# EAGLE board 2-28-13 x4 (EAGLE 6.3), part 1 of 3
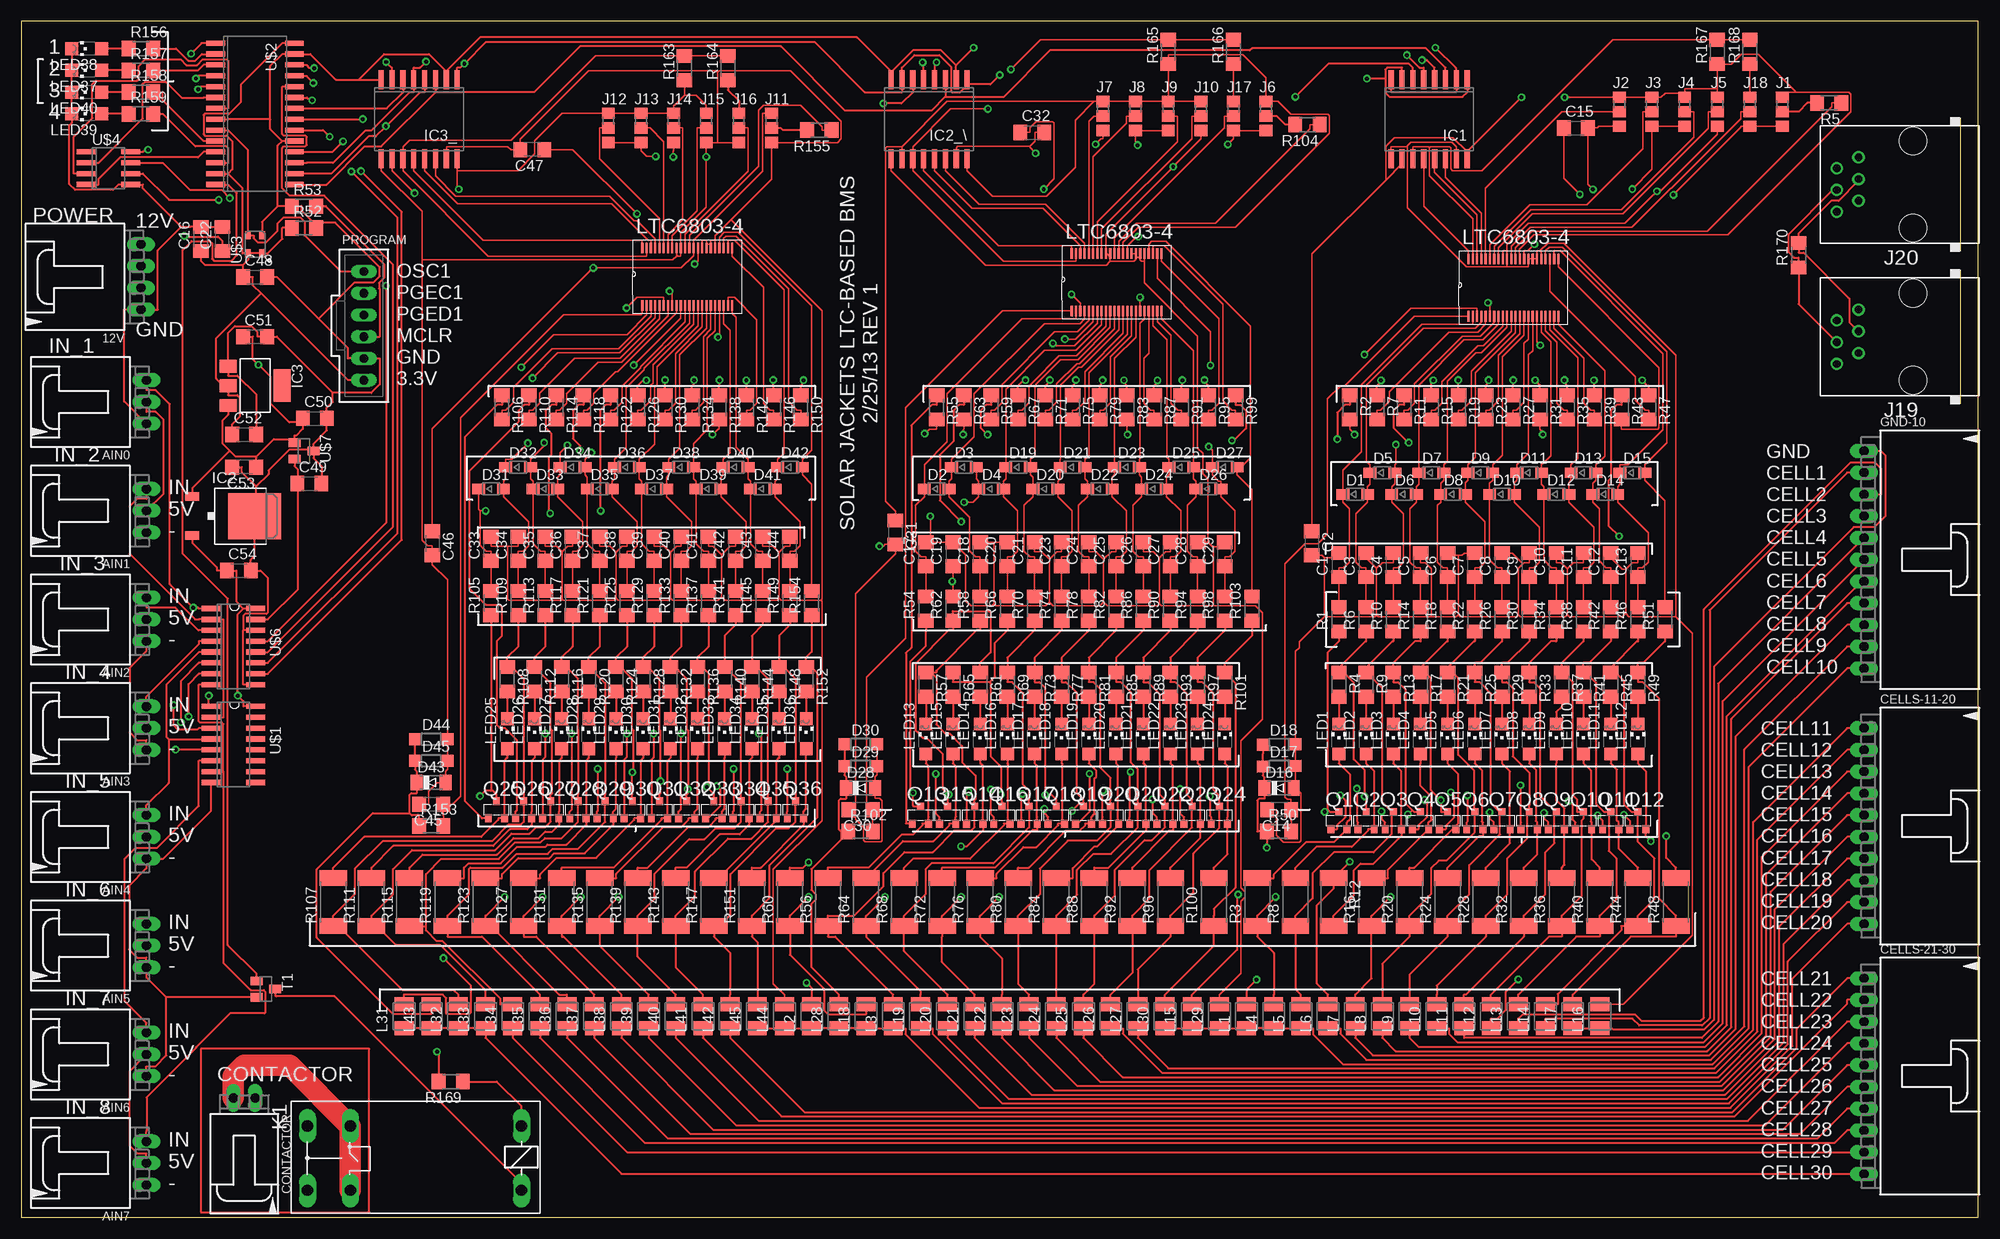
[diagram p0: board, top side]
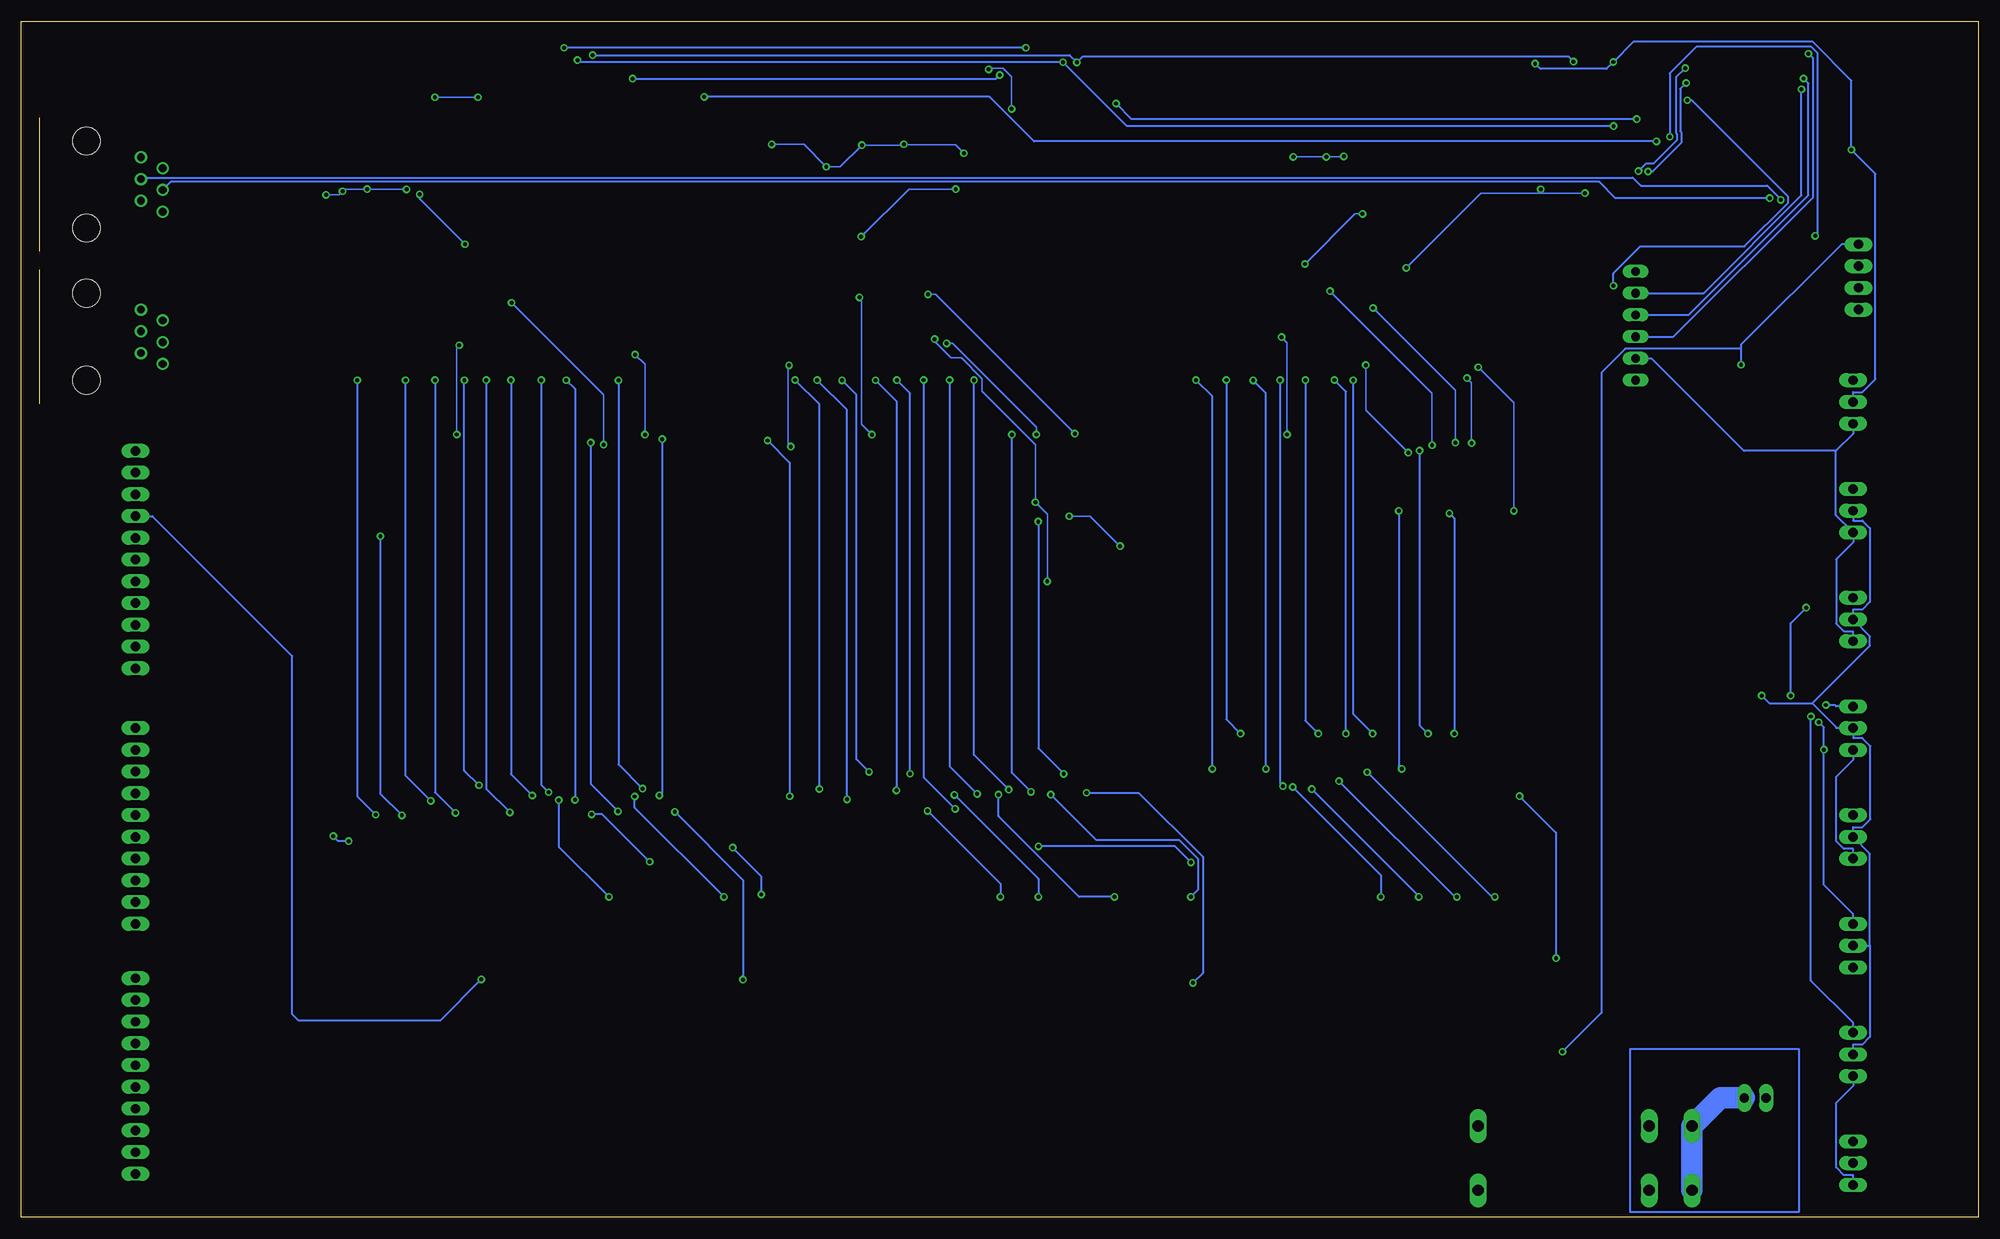
[diagram p1: board, bottom side, seen from below]

Size 228.6 x 139.7 mm. Coordinates in mm from the lower left corner, seen from the top.
Outline: 0,0 228.6,0 228.6,139.7 0,139.7 0,0
Copper layers (1*16): Top 0.035mm / dielectric 1.5mm / Bottom 0.035mm
Design rules "default": minimum track width 10mil, minimum drill 24mil, track to track 8mil, track to pad 8mil, pad to pad 8mil, via to via 8mil, smd to smd 8mil, copper to edge 40mil, drill to drill 8mil, minimum pad ring 10mil, minimum via ring 8mil, stop-mask expansion 4mil, vias tented up to drill 0mil, thermal gap 10mil
Net classes: 0 default: width 0.254 mm; 1 Mini: width 0.203 mm
tRestrict: 3 lines
bRestrict: 3 lines

## Footprints (pad centres in the part's own frame; a part is rotated, then mirrored left to right if it is on the bottom)
70553-04 = drill 1.092 long: 1 -3.81,-7.62; 2 -1.27,-7.62; 3 1.27,-7.62; 4 3.81,-7.62
70553-03 = drill 1.092 long: 1 -2.54,-7.62; 2 0,-7.62; 3 2.54,-7.62
C1206 = smd 1.6 x 1.8: 1 -1.4,0; 2 1.4,0
70553-10 = drill 1.092 long: 1 -11.43,-7.62; 2 -8.89,-7.62; 3 -6.35,-7.62; 4 -3.81,-7.62; 5 -1.27,-7.62; 6 1.27,-7.62; 7 3.81,-7.62; 8 6.35,-7.62; 9 8.89,-7.62; 10 11.43,-7.62
70553-02 = drill 1.092 long: 1 -1.27,-7.62; 2 1.27,-7.62
SOD323-W = smd 1.5 x 1.2: A 1.45,0; C -1.45,0
MINIMELF = smd 1.4 x 1.8: A 1.7,0; C -1.7,0
SOD123 = smd 1.4 x 1.4: A 1.9,0; C -1.9,0
70553-11 = drill 1.092 long: 1 -12.7,-7.62; 2 -10.16,-7.62; 3 -7.62,-7.62; 4 -5.08,-7.62; 5 -2.54,-7.62; 6 0,-7.62; 7 2.54,-7.62; 8 5.08,-7.62; 9 7.62,-7.62; 10 10.16,-7.62; 11 12.7,-7.62
SO16W = smd 0.6 x 2.2: 1 -4.445,-4.6; 2 -3.175,-4.6; 3 -1.905,-4.6; 4 -0.635,-4.6; 5 0.635,-4.6; 6 1.905,-4.6; 7 3.175,-4.6; 8 4.445,-4.6; 9 4.445,4.6; 10 3.175,4.6; 11 1.905,4.6; 12 0.635,4.6; 13 -0.635,4.6; 14 -1.905,4.6; 15 -3.175,4.6; 16 -4.445,4.6
TO252 = smd 1 x 1.6: 1 -2.28,-4.8; 2 2.28,-4.8 | smd 5.4 x 6.2: 3 0,2.5
SOT223 = smd 1.499 x 2.007: 1 -2.261,-3.15; 2 0.025,-3.15; 3 2.311,-3.15 | smd 3.81 x 2.007: 4 0,3.15
A0R-JMP = smd 1.5 x 1.3: 1 0,1.7; 2 0,0; 3 0,-1.7
RJ11-NO_SHIELD = drill 0.9 pad 1.4: 1 -3.175,8.89; 2 -1.905,6.35; 3 -0.635,8.89; 4 0.635,6.35; 5 1.905,8.89; 6 3.175,6.35 | hole 3.251: -5.08,0; 5.08,0
G2REA = drill 1.321 long: 1 -2.54,-3.683; 2 -2.54,3.81; P 17.45,-3.683; P@ 17.45,3.81; S 22.454,-3.683; S@ 22.454,3.81
L3225M = smd 1.6 x 2.2: 1 -1.4,0; 2 1.4,0
CHIPLED_1206 = smd 1.5 x 1.5: A 0,-1.75; C 0,1.75
SSOP44 = smd 0.25 x 1.25: P$1 -5.82,-3.33; P$2 -5.32,-3.33; P$3 -4.82,-3.33; P$4 -4.32,-3.33; P$5 -3.82,-3.33; P$6 -3.32,-3.33; P$7 -2.82,-3.33; P$8 -2.32,-3.33; P$9 -1.82,-3.33; P$10 -1.32,-3.33; P$11 -0.82,-3.33; P$12 -0.32,-3.33; P$13 0.18,-3.33; P$14 0.68,-3.33; P$15 1.18,-3.33; P$16 1.68,-3.33; P$17 2.18,-3.33; P$18 2.68,-3.33; P$19 3.18,-3.33; P$20 3.68,-3.33; P$21 4.18,-3.33; P$22 4.68,-3.33; P$23 4.68,3.37; P$24 4.18,3.37; P$25 3.68,3.37; P$26 3.18,3.37; P$27 2.68,3.37; P$28 2.18,3.37; P$29 1.68,3.37; P$30 1.18,3.37; P$31 0.68,3.37; P$32 0.18,3.37; P$33 -0.32,3.37; P$34 -0.82,3.37; P$35 -1.32,3.37; P$36 -1.82,3.37; P$37 -2.32,3.37; P$38 -2.82,3.37; P$39 -3.32,3.37; P$40 -3.82,3.37; P$41 -4.32,3.37; P$42 -4.82,3.37; P$43 -5.32,3.37; P$44 -5.82,3.37
70543-06 = drill 1.016 long: 1 -6.35,0; 2 -3.81,0; 3 -1.27,0; 4 1.27,0; 5 3.81,0; 6 6.35,0
MICRO3 = smd 0.8 x 0.9: 1 -0.95,-1; 2 0.95,-1; 3 0,1
R1206 = smd 1.6 x 1.803: 1 -1.422,0; 2 1.422,0
R2512 = smd 1.8 x 3.2: 1 -2.8,0; 2 2.8,0
SOT23 = smd 1 x 1.4: 1 -0.95,-1.1; 2 0.95,-1.1; 3 0,1.1
SO16 = smd 0.6 x 2.2: 1 -4.445,-2.6; 2 -3.175,-2.6; 3 -1.905,-2.6; 4 -0.635,-2.6; 5 0.635,-2.6; 6 1.905,-2.6; 7 3.175,-2.6; 8 4.445,-2.6; 9 4.445,2.6; 10 3.175,2.6; 11 1.905,2.6; 12 0.635,2.6; 13 -0.635,2.6; 14 -1.905,2.6; 15 -3.175,2.6; 16 -4.445,2.6
SO28W = smd 0.6 x 2.2: 1 -8.255,-4.6; 2 -6.985,-4.6; 3 -5.715,-4.6; 4 -4.445,-4.6; 5 -3.175,-4.6; 6 -1.905,-4.6; 7 -0.635,-4.6; 8 0.635,-4.6; 9 1.905,-4.6; 10 3.175,-4.6; 11 4.445,-4.6; 12 5.715,-4.6; 13 6.985,-4.6; 14 8.255,-4.6; 15 8.255,4.6; 16 6.985,4.6; 17 5.715,4.6; 18 4.445,4.6; 19 3.175,4.6; 20 1.905,4.6; 21 0.635,4.6; 22 -0.635,4.6; 23 -1.905,4.6; 24 -3.175,4.6; 25 -4.445,4.6; 26 -5.715,4.6; 27 -6.985,4.6; 28 -8.255,4.6
ASE = smd 0.9 x 0.65: 1 -1.05,-0.825; 2 1.05,-0.825; 3 1.05,0.825; 4 -1.05,0.825
SO-08 = smd 0.6 x 2.2: 1 -1.905,-2.6; 2 -0.635,-2.6; 3 0.635,-2.6; 4 1.905,-2.6; 5 1.905,2.6; 6 0.635,2.6; 7 -0.635,2.6; 8 -1.905,2.6

## Placement (x,y rotation side)
12V  C-GRID-04-70553  [70553-04]  6.35,109.86 90 top
AIN0  C-GRID-03-70553  [70553-03]  6.99,95.25 90 top
AIN1  C-GRID-03-70553  [70553-03]  6.99,82.55 90 top
AIN2  C-GRID-03-70553  [70553-03]  6.99,69.85 90 top
AIN3  C-GRID-03-70553  [70553-03]  6.99,57.15 90 top
AIN4  C-GRID-03-70553  [70553-03]  6.99,44.45 90 top
AIN5  C-GRID-03-70553  [70553-03]  6.99,31.75 90 top
AIN6  C-GRID-03-70553  [70553-03]  6.99,19.05 90 top
AIN7  C-GRID-03-70553  [70553-03]  6.99,6.35 90 top
C1  100nF 100V  [C1206]  153.92,76.2 90 top
C2  1uF  [C1206]  150.75,78.74 270 top
C3  100nF 100V  [C1206]  157.1,76.2 90 top
C4  100nF 100V  [C1206]  160.27,76.2 90 top
C5  100nF 100V  [C1206]  163.45,76.2 90 top
C6  100nF 100V  [C1206]  166.62,76.2 90 top
C7  100nF 100V  [C1206]  169.8,76.2 90 top
C8  100nF 100V  [C1206]  172.97,76.2 90 top
C9  100nF 100V  [C1206]  176.15,76.2 90 top
C10  100nF 100V  [C1206]  179.32,76.2 90 top
C11  100nF 100V  [C1206]  182.5,76.2 90 top
C12  100nF 100V  [C1206]  185.67,76.2 90 top
C13  100nF 100V  [C1206]  188.85,76.2 90 top
C14  100nF 100V  [C1206]  146.94,47.62 180 top
C15  1uF  [C1206]  181.61,127.25 0 top
C16  .1uF  [C1206]  20.95,114.3 90 top
C17  100nF 100V  [C1206]  105.66,77.47 90 top
C18  100nF 100V  [C1206]  112.01,77.47 90 top
C19  100nF 100V  [C1206]  108.84,77.47 90 top
C20  100nF 100V  [C1206]  115.19,77.47 90 top
C21  100nF 100V  [C1206]  118.36,77.47 90 top
C22  1uF  [C1206]  23.5,114.3 90 top
C23  100nF 100V  [C1206]  121.54,77.47 90 top
C24  100nF 100V  [C1206]  124.71,77.47 90 top
C25  100nF 100V  [C1206]  127.89,77.47 90 top
C26  100nF 100V  [C1206]  131.06,77.47 90 top
C27  100nF 100V  [C1206]  134.24,77.47 90 top
C28  100nF 100V  [C1206]  137.41,77.47 90 top
C29  100nF 100V  [C1206]  140.59,77.47 90 top
C30  100nF 100V  [C1206]  98.04,47.62 180 top
C31  1uF  [C1206]  102.11,80.01 270 top
C32  1uF  [C1206]  118.11,126.75 0 top
C33  100nF 100V  [C1206]  54.86,78.11 90 top
C34  100nF 100V  [C1206]  58.04,78.11 90 top
C35  100nF 100V  [C1206]  61.21,78.11 90 top
C36  100nF 100V  [C1206]  64.39,78.11 90 top
C37  100nF 100V  [C1206]  67.56,78.11 90 top
C38  100nF 100V  [C1206]  70.74,78.11 90 top
C39  100nF 100V  [C1206]  73.91,78.11 90 top
C40  100nF 100V  [C1206]  77.09,78.11 90 top
C41  100nF 100V  [C1206]  80.26,78.11 90 top
C42  100nF 100V  [C1206]  83.44,78.11 90 top
C43  100nF 100V  [C1206]  86.61,78.11 90 top
C44  100nF 100V  [C1206]  89.79,78.11 90 top
C45  100nF 100V  [C1206]  47.88,48.26 180 top
C46  1uF  [C1206]  48.01,78.74 270 top
C47  1uF  [C1206]  59.69,124.71 180 top
C48  .1uF  [C1206]  27.3,109.86 0 top
C49  .1uF  [C1206]  33.66,85.72 0 top
C50  1uF  [C1206]  34.29,93.34 0 top
C51  1uF  [C1206]  27.3,102.87 0 top
C52  .1uF  [C1206]  26.04,91.44 0 top
C53  1uF  [C1206]  26.04,87.63 180 top
C54  .1uF  [C1206]  25.4,75.56 0 top
CELLS-11-20  C-GRID-10-70553  [70553-10]  222.88,45.72 270 top
CELLS-21-30  C-GRID-10-70553  [70553-10]  222.88,16.51 270 top
CONTACTOR  C-GRID-02-70553  [70553-02]  26.04,6.35 180 top
D1  PDZ7.5B  [SOD323-W]  155.83,84.45 0 top
D2  PDZ7.5B  [SOD323-W]  106.93,85.09 0 top
D3  PDZ7.5B  [SOD323-W]  110.11,87.63 0 top
D4  PDZ7.5B  [SOD323-W]  113.28,85.09 0 top
D5  PDZ7.5B  [SOD323-W]  159,87 0 top
D6  PDZ7.5B  [SOD323-W]  161.54,84.45 0 top
D7  PDZ7.5B  [SOD323-W]  164.72,87 0 top
D8  PDZ7.5B  [SOD323-W]  167.26,84.45 0 top
D9  PDZ7.5B  [SOD323-W]  170.43,87 0 top
D10  PDZ7.5B  [SOD323-W]  172.97,84.45 0 top
D11  PDZ7.5B  [SOD323-W]  176.15,87 0 top
D12  PDZ7.5B  [SOD323-W]  179.32,84.45 0 top
D13  PDZ7.5B  [SOD323-W]  182.5,87 0 top
D14  PDZ7.5B  [SOD323-W]  185.04,84.45 0 top
D15  PDZ7.5B  [SOD323-W]  188.21,87 0 top
D16  ZMM5265B-7  [MINIMELF]  146.94,50.16 0 top
D17  BAT46W  [SOD123]  146.94,52.7 1 top
D18  BAT46W  [SOD123]  146.94,55.24 1 top
D19  PDZ7.5B  [SOD323-W]  116.46,87.63 0 top
D20  PDZ7.5B  [SOD323-W]  119.63,85.09 0 top
D21  PDZ7.5B  [SOD323-W]  122.81,87.63 0 top
D22  PDZ7.5B  [SOD323-W]  125.98,85.09 0 top
D23  PDZ7.5B  [SOD323-W]  129.16,87.63 0 top
D24  PDZ7.5B  [SOD323-W]  132.33,85.09 0 top
D25  PDZ7.5B  [SOD323-W]  135.51,87.63 0 top
D26  PDZ7.5B  [SOD323-W]  138.68,85.09 0 top
D27  PDZ7.5B  [SOD323-W]  140.59,87.63 0 top
D28  ZMM5265B-7  [MINIMELF]  98.04,50.16 0 top
D29  BAT46W  [SOD123]  98.04,52.7 0 top
D30  BAT46W  [SOD123]  98.04,55.24 0 top
D31  PDZ7.5B  [SOD323-W]  54.86,85.09 0 top
D32  PDZ7.5B  [SOD323-W]  58.04,87.63 0 top
D33  PDZ7.5B  [SOD323-W]  61.21,85.09 0 top
D34  PDZ7.5B  [SOD323-W]  64.39,87.63 0 top
D35  PDZ7.5B  [SOD323-W]  67.56,85.09 0 top
D36  PDZ7.5B  [SOD323-W]  70.74,87.63 0 top
D37  PDZ7.5B  [SOD323-W]  73.91,85.09 0 top
D38  PDZ7.5B  [SOD323-W]  77.09,87.63 0 top
D39  PDZ7.5B  [SOD323-W]  80.26,85.09 0 top
D40  PDZ7.5B  [SOD323-W]  83.44,87.63 0 top
D41  PDZ7.5B  [SOD323-W]  86.61,85.09 0 top
D42  PDZ7.5B  [SOD323-W]  89.79,87.63 0 top
D43  ZMM5265B-7  [MINIMELF]  47.88,50.8 0 top
D44  BAT46W  [SOD123]  47.88,55.88 0 top
D45  BAT46W  [SOD123]  47.88,53.34 0 top
GND-10  C-GRID-11-70553  [70553-11]  222.88,76.83 270 top
IC1  ADUM1401  [SO16W]  164.47,128.27 180 top
IC2  7805DT  [TO252]  24.77,81.92 270 top
IC2_\  ADUM1401  [SO16W]  106.05,128.27 180 top
IC3  REG1117  [SOT223]  27.3,97.16 270 top
IC3_  ADUM1401  [SO16W]  46.48,128.27 180 top
J1  TOS_LTC1  [A0R-JMP]  205.74,129.16 0 top
J2  A3_LTC1  [A0R-JMP]  186.69,129.16 0 top
J3  A2_LTC1  [A0R-JMP]  190.5,129.16 0 top
J4  A1_LTC1  [A0R-JMP]  194.31,129.16 0 top
J5  A0_LTC1  [A0R-JMP]  198.12,129.16 0 top
J6  TOS_LTC2  [A0R-JMP]  145.41,128.65 0 top
J7  A3_LTC2  [A0R-JMP]  126.36,128.65 0 top
J8  A2_LTC2  [A0R-JMP]  130.18,128.65 0 top
J9  A1_LTC2  [A0R-JMP]  133.99,128.65 0 top
J10  A0_LTC2  [A0R-JMP]  137.79,128.65 0 top
J11  TOS_LTC3  [A0R-JMP]  87.63,127.25 0 top
J12  A3_LTC3  [A0R-JMP]  68.58,127.25 0 top
J13  A2_LTC3  [A0R-JMP]  72.39,127.25 0 top
J14  A1_LTC3  [A0R-JMP]  76.2,127.25 0 top
J15  A0_LTC3  [A0R-JMP]  80.01,127.25 0 top
J16  WDTB_LTC3  [A0R-JMP]  83.82,127.25 0 top
J17  WDTB_LTC2  [A0R-JMP]  141.6,128.65 0 top
J18  WDTB_LTC1  [A0R-JMP]  201.93,129.16 0 top
J19  RJ11-2L-B  [RJ11-NO_SHIELD]  220.98,102.87 90 top
J20  RJ11-2L-B  [RJ11-NO_SHIELD]  220.98,120.65 90 top
K1  G2REA  [G2REA]  55.88,6.99 180 top
L1  IMC1210ER100K  [L3225M]  143.13,23.5 90 top
L2  IMC1210ER100K  [L3225M]  92.33,23.5 90 top
L3  IMC1210ER100K  [L3225M]  101.85,23.5 90 top
L4  IMC1210ER100K  [L3225M]  146.3,23.5 90 top
L5  IMC1210ER100K  [L3225M]  149.48,23.5 90 top
L6  IMC1210ER100K  [L3225M]  152.65,23.5 90 top
L7  IMC1210ER100K  [L3225M]  155.83,23.5 90 top
L8  IMC1210ER100K  [L3225M]  159,23.5 90 top
L9  IMC1210ER100K  [L3225M]  162.18,23.5 90 top
L10  IMC1210ER100K  [L3225M]  165.35,23.5 90 top
L11  IMC1210ER100K  [L3225M]  168.53,23.5 90 top
L12  IMC1210ER100K  [L3225M]  171.7,23.5 90 top
L13  IMC1210ER100K  [L3225M]  174.88,23.5 90 top
L14  IMC1210ER100K  [L3225M]  178.05,23.5 90 top
L15  IMC1210ER100K  [L3225M]  136.78,23.5 90 top
L16  IMC1210ER100K  [L3225M]  184.4,23.5 90 top
L17  IMC1210ER100K  [L3225M]  181.23,23.5 90 top
L18  IMC1210ER100K  [L3225M]  98.68,23.5 90 top
L19  IMC1210ER100K  [L3225M]  105.03,23.5 90 top
L20  IMC1210ER100K  [L3225M]  108.2,23.5 90 top
L21  IMC1210ER100K  [L3225M]  111.38,23.5 90 top
L22  IMC1210ER100K  [L3225M]  114.55,23.5 90 top
L23  IMC1210ER100K  [L3225M]  117.73,23.5 90 top
L24  IMC1210ER100K  [L3225M]  120.9,23.5 90 top
L25  IMC1210ER100K  [L3225M]  124.08,23.5 90 top
L26  IMC1210ER100K  [L3225M]  127.25,23.5 90 top
L27  IMC1210ER100K  [L3225M]  130.43,23.5 90 top
L28  IMC1210ER100K  [L3225M]  95.5,23.5 90 top
L29  IMC1210ER100K  [L3225M]  139.95,23.5 90 top
L30  IMC1210ER100K  [L3225M]  133.6,23.5 90 top
L31  IMC1210ER100K  [L3225M]  44.7,23.5 90 top
L32  IMC1210ER100K  [L3225M]  51.05,23.5 90 top
L33  IMC1210ER100K  [L3225M]  54.23,23.5 90 top
L34  IMC1210ER100K  [L3225M]  57.4,23.5 90 top
L35  IMC1210ER100K  [L3225M]  60.58,23.5 90 top
L36  IMC1210ER100K  [L3225M]  63.75,23.5 90 top
L37  IMC1210ER100K  [L3225M]  66.93,23.5 90 top
L38  IMC1210ER100K  [L3225M]  70.1,23.5 90 top
L39  IMC1210ER100K  [L3225M]  73.28,23.5 90 top
L40  IMC1210ER100K  [L3225M]  76.45,23.5 90 top
L41  IMC1210ER100K  [L3225M]  79.63,23.5 90 top
L42  IMC1210ER100K  [L3225M]  82.8,23.5 90 top
L43  IMC1210ER100K  [L3225M]  47.88,23.5 90 top
L44  IMC1210ER100K  [L3225M]  89.15,23.5 90 top
L45  IMC1210ER100K  [L3225M]  85.98,23.5 90 top
LED1  BLUE  [CHIPLED_1206]  153.92,55.88 0 top
LED2  BLUE  [CHIPLED_1206]  157.1,55.88 0 top
LED3  BLUE  [CHIPLED_1206]  160.27,55.88 0 top
LED4  BLUE  [CHIPLED_1206]  163.45,55.88 0 top
LED5  BLUE  [CHIPLED_1206]  166.62,55.88 0 top
LED6  BLUE  [CHIPLED_1206]  169.8,55.88 0 top
LED7  BLUE  [CHIPLED_1206]  172.97,55.88 0 top
LED8  BLUE  [CHIPLED_1206]  176.15,55.88 0 top
LED9  BLUE  [CHIPLED_1206]  179.32,55.88 0 top
LED10  BLUE  [CHIPLED_1206]  182.5,55.88 0 top
LED11  BLUE  [CHIPLED_1206]  185.67,55.88 0 top
LED12  BLUE  [CHIPLED_1206]  188.85,55.88 0 top
LED13  BLUE  [CHIPLED_1206]  105.66,55.88 0 top
LED14  BLUE  [CHIPLED_1206]  112.01,55.88 0 top
LED15  BLUE  [CHIPLED_1206]  108.84,55.88 0 top
LED16  BLUE  [CHIPLED_1206]  115.19,55.88 0 top
LED17  BLUE  [CHIPLED_1206]  118.36,55.88 0 top
LED18  BLUE  [CHIPLED_1206]  121.54,55.88 0 top
LED19  BLUE  [CHIPLED_1206]  124.71,55.88 0 top
LED20  BLUE  [CHIPLED_1206]  127.89,55.88 0 top
LED21  BLUE  [CHIPLED_1206]  131.06,55.88 0 top
LED22  BLUE  [CHIPLED_1206]  134.24,55.88 0 top
LED23  BLUE  [CHIPLED_1206]  137.41,55.88 0 top
LED24  BLUE  [CHIPLED_1206]  140.59,55.88 0 top
LED25  BLUE  [CHIPLED_1206]  56.77,56.52 0 top
LED26  BLUE  [CHIPLED_1206]  59.94,56.52 0 top
LED27  BLUE  [CHIPLED_1206]  63.12,56.52 0 top
LED28  BLUE  [CHIPLED_1206]  66.29,56.52 0 top
LED29  BLUE  [CHIPLED_1206]  69.47,56.52 0 top
LED30  BLUE  [CHIPLED_1206]  72.64,56.52 0 top
LED31  BLUE  [CHIPLED_1206]  75.82,56.52 0 top
LED32  BLUE  [CHIPLED_1206]  78.99,56.52 0 top
LED33  BLUE  [CHIPLED_1206]  82.17,56.52 0 top
LED34  BLUE  [CHIPLED_1206]  85.34,56.52 0 top
LED35  BLUE  [CHIPLED_1206]  88.52,56.52 0 top
LED36  BLUE  [CHIPLED_1206]  91.69,56.52 0 top
LED37  YELLOW  [CHIPLED_1206]  7.62,133.99 90 top
LED38  RED  [CHIPLED_1206]  7.62,136.53 90 top
LED39  GREEN  [CHIPLED_1206]  7.62,128.91 90 top
LED40  YELLOW  [CHIPLED_1206]  7.62,131.44 90 top
LTC1  LTC6803-4  [SSOP44]  174.88,108.58 0 top
LTC2  LTC6803-4  [SSOP44]  128.52,109.22 0 top
LTC3  LTC6803-4  [SSOP44]  78.36,109.86 0 top
PROGRAM  C-GRID-06-70543  [70543-06]  40.01,104.14 270 top
Q1  SI2351DS  [MICRO3]  153.92,46.35 0 top
Q2  SI2351DS  [MICRO3]  157.1,46.35 0 top
Q3  SI2351DS  [MICRO3]  160.27,46.35 0 top
Q4  SI2351DS  [MICRO3]  163.45,46.35 0 top
Q5  SI2351DS  [MICRO3]  166.62,46.35 0 top
Q6  SI2351DS  [MICRO3]  169.8,46.35 0 top
Q7  SI2351DS  [MICRO3]  172.97,46.35 0 top
Q8  SI2351DS  [MICRO3]  176.15,46.35 0 top
Q9  SI2351DS  [MICRO3]  179.32,46.35 0 top
Q10  SI2351DS  [MICRO3]  182.5,46.35 0 top
Q11  SI2351DS  [MICRO3]  185.67,46.35 0 top
Q12  SI2351DS  [MICRO3]  188.85,46.35 0 top
Q13  SI2351DS  [MICRO3]  105.03,46.99 0 top
Q14  SI2351DS  [MICRO3]  111.38,46.99 0 top
Q15  SI2351DS  [MICRO3]  108.2,46.99 0 top
Q16  SI2351DS  [MICRO3]  114.55,46.99 0 top
Q17  SI2351DS  [MICRO3]  117.73,46.99 0 top
Q18  SI2351DS  [MICRO3]  120.9,46.99 0 top
Q19  SI2351DS  [MICRO3]  124.08,46.99 0 top
Q20  SI2351DS  [MICRO3]  127.25,46.99 0 top
Q21  SI2351DS  [MICRO3]  130.43,46.99 0 top
Q22  SI2351DS  [MICRO3]  133.6,46.99 0 top
Q23  SI2351DS  [MICRO3]  136.78,46.99 0 top
Q24  SI2351DS  [MICRO3]  139.95,46.99 0 top
Q25  SI2351DS  [MICRO3]  55.5,47.62 0 top
Q26  SI2351DS  [MICRO3]  58.67,47.62 0 top
Q27  SI2351DS  [MICRO3]  61.85,47.62 0 top
Q28  SI2351DS  [MICRO3]  65.02,47.62 0 top
Q29  SI2351DS  [MICRO3]  68.2,47.62 0 top
Q30  SI2351DS  [MICRO3]  71.37,47.62 0 top
Q31  SI2351DS  [MICRO3]  74.55,47.62 0 top
Q32  SI2351DS  [MICRO3]  77.72,47.62 0 top
Q33  SI2351DS  [MICRO3]  80.9,47.62 0 top
Q34  SI2351DS  [MICRO3]  84.07,47.62 0 top
Q35  SI2351DS  [MICRO3]  87.25,47.62 0 top
Q36  SI2351DS  [MICRO3]  90.42,47.62 0 top
R1  100 1%  [R1206]  153.92,69.85 90 top
R2  3.3K  [R1206]  155.19,94.61 270 top
R3  33 1W  [R2512]  144.4,36.83 90 top
R4  62  [R1206]  153.92,62.23 270 top
R5  1M  [R1206]  211.2,130.18 180 top
R6  100 1%  [R1206]  157.1,69.85 90 top
R7  3.3K  [R1206]  158.37,94.61 270 top
R8  33 1W  [R2512]  148.84,36.83 90 top
R9  62  [R1206]  157.1,62.23 270 top
R10  100 1%  [R1206]  160.27,69.85 90 top
R11  3.3K  [R1206]  161.54,94.61 270 top
R12  33 1W  [R2512]  153.29,36.83 270 top
R13  62  [R1206]  160.27,62.23 270 top
R14  100 1%  [R1206]  163.45,69.85 90 top
R15  3.3K  [R1206]  164.72,94.61 270 top
R16  33 1W  [R2512]  157.73,36.83 90 top
R17  62  [R1206]  163.45,62.23 270 top
R18  100 1%  [R1206]  166.62,69.85 90 top
R19  3.3K  [R1206]  167.89,94.61 270 top
R20  33 1W  [R2512]  162.18,36.83 90 top
R21  62  [R1206]  166.62,62.23 270 top
R22  100 1%  [R1206]  169.8,69.85 90 top
R23  3.3K  [R1206]  171.07,94.61 270 top
R24  33 1W  [R2512]  166.62,36.83 90 top
R25  62  [R1206]  169.8,62.23 270 top
R26  100 1%  [R1206]  172.97,69.85 90 top
R27  3.3K  [R1206]  174.24,94.61 270 top
R28  33 1W  [R2512]  171.07,36.83 90 top
R29  62  [R1206]  172.97,62.23 270 top
R30  100 1%  [R1206]  176.15,69.85 90 top
R31  3.3K  [R1206]  177.42,94.61 270 top
R32  33 1W  [R2512]  175.51,36.83 90 top
R33  62  [R1206]  176.15,62.23 270 top
R34  100 1%  [R1206]  179.32,69.85 90 top
R35  3.3K  [R1206]  180.59,94.61 270 top
R36  33 1W  [R2512]  179.96,36.83 90 top
R37  62  [R1206]  179.96,62.23 270 top
R38  100 1%  [R1206]  182.5,69.85 90 top
R39  3.3K  [R1206]  183.77,94.61 270 top
R40  33 1W  [R2512]  184.4,36.83 90 top
R41  62  [R1206]  182.5,62.23 270 top
R42  100 1%  [R1206]  185.67,69.85 90 top
R43  3.3K  [R1206]  186.94,94.61 270 top
R44  33 1W  [R2512]  188.85,36.83 90 top
R45  62  [R1206]  185.67,62.23 270 top
R46  100 1%  [R1206]  188.85,69.85 90 top
R47  3.3K  [R1206]  190.12,94.61 270 top
R48  33 1W  [R2512]  193.29,36.83 90 top
R49  62  [R1206]  188.85,62.23 270 top
R50  100  [R1206]  146.94,45.09 0 top
R51  100 1%  [R1206]  192.02,69.85 90 top
R52  10k\  [R1206]  33.02,115.57 0 top
R53  470  [R1206]  33.02,118.11 0 top
R54  100 1%  [R1206]  105.66,71.12 90 top
R55  3.3K  [R1206]  106.93,94.61 270 top
R56  33 1W  [R2512]  94.23,36.83 90 top
R57  62  [R1206]  105.66,62.23 270 top
R58  100 1%  [R1206]  112.01,71.12 90 top
R59  3.3K  [R1206]  113.28,94.61 270 top
R60  33 1W  [R2512]  89.79,36.83 90 top
R61  62  [R1206]  112.01,62.23 270 top
R62  100 1%  [R1206]  108.84,71.12 90 top
R63  3.3K  [R1206]  110.11,94.61 270 top
R64  33 1W  [R2512]  98.68,36.83 90 top
R65  62  [R1206]  108.84,62.23 270 top
R66  100 1%  [R1206]  115.19,71.12 90 top
R67  3.3K  [R1206]  116.46,94.61 270 top
R68  33 1W  [R2512]  103.12,36.83 90 top
R69  62  [R1206]  115.19,62.23 270 top
R70  100 1%  [R1206]  118.36,71.12 90 top
R71  3.3K  [R1206]  119.63,94.61 270 top
R72  33 1W  [R2512]  107.57,36.83 90 top
R73  62  [R1206]  118.36,62.23 270 top
R74  100 1%  [R1206]  121.54,71.12 90 top
R75  3.3K  [R1206]  122.81,94.61 270 top
R76  33 1W  [R2512]  112.01,36.83 90 top
R77  62  [R1206]  121.54,62.23 270 top
R78  100 1%  [R1206]  124.71,71.12 90 top
R79  3.3K  [R1206]  125.98,94.61 270 top
R80  33 1W  [R2512]  116.46,36.83 90 top
R81  62  [R1206]  124.71,62.23 270 top
R82  100 1%  [R1206]  127.89,71.12 90 top
R83  3.3K  [R1206]  129.16,94.61 270 top
R84  33 1W  [R2512]  120.9,36.83 90 top
R85  62  [R1206]  127.89,62.23 270 top
R86  100 1%  [R1206]  131.06,71.12 90 top
R87  3.3K  [R1206]  132.33,94.61 270 top
R88  33 1W  [R2512]  125.35,36.83 90 top
R89  62  [R1206]  131.06,62.23 270 top
R90  100 1%  [R1206]  134.24,71.12 90 top
R91  3.3K  [R1206]  135.51,94.61 270 top
R92  33 1W  [R2512]  129.79,36.83 90 top
R93  62  [R1206]  134.24,62.23 270 top
R94  100 1%  [R1206]  137.41,71.12 90 top
R95  3.3K  [R1206]  138.68,94.61 270 top
R96  33 1W  [R2512]  134.24,36.83 90 top
R97  62  [R1206]  137.41,62.23 270 top
R98  100 1%  [R1206]  140.59,71.12 90 top
R99  3.3K  [R1206]  141.86,94.61 270 top
R100  33 1W  [R2512]  139.32,36.83 90 top
R101  62  [R1206]  140.59,62.23 270 top
R102  100  [R1206]  98.04,45.09 0 top
R103  100 1%  [R1206]  143.76,71.12 90 top
R104  1M  [R1206]  150.24,127.64 180 top
R105  100 1%  [R1206]  54.86,71.75 90 top
R106  3.3K  [R1206]  56.13,94.61 270 top
R107  33 1W  [R2512]  36.45,36.83 90 top
R108  62  [R1206]  56.77,62.87 270 top
R109  100 1%  [R1206]  58.04,71.75 90 top
R110  3.3K  [R1206]  59.31,94.61 270 top
R111  33 1W  [R2512]  40.89,36.83 90 top
R112  62  [R1206]  59.94,62.87 270 top
R113  100 1%  [R1206]  61.21,71.75 90 top
R114  3.3K  [R1206]  62.48,94.61 270 top
R115  33 1W  [R2512]  45.34,36.83 90 top
R116  62  [R1206]  63.12,62.87 270 top
R117  100 1%  [R1206]  64.39,71.75 90 top
R118  3.3K  [R1206]  65.66,94.61 270 top
R119  33 1W  [R2512]  49.78,36.83 90 top
R120  62  [R1206]  66.29,62.87 270 top
R121  100 1%  [R1206]  67.56,71.75 90 top
R122  3.3K  [R1206]  68.83,94.61 270 top
R123  33 1W  [R2512]  54.23,36.83 90 top
R124  62  [R1206]  69.47,62.87 270 top
R125  100 1%  [R1206]  70.74,71.75 90 top
R126  3.3K  [R1206]  72.01,94.61 270 top
R127  33 1W  [R2512]  58.67,36.83 90 top
R128  62  [R1206]  72.64,62.87 270 top
R129  100 1%  [R1206]  73.91,71.75 90 top
R130  3.3K  [R1206]  75.18,94.61 270 top
R131  33 1W  [R2512]  63.12,36.83 90 top
R132  62  [R1206]  75.82,62.87 270 top
R133  100 1%  [R1206]  77.09,71.75 90 top
R134  3.3K  [R1206]  78.36,94.61 270 top
R135  33 1W  [R2512]  67.56,36.83 90 top
R136  62  [R1206]  78.99,62.87 270 top
R137  100 1%  [R1206]  80.26,71.75 90 top
R138  3.3K  [R1206]  81.53,94.61 270 top
R139  33 1W  [R2512]  72.01,36.83 90 top
R140  62  [R1206]  82.17,62.87 270 top
R141  100 1%  [R1206]  83.44,71.75 90 top
R142  3.3K  [R1206]  84.71,94.61 270 top
R143  33 1W  [R2512]  76.45,36.83 90 top
R144  62  [R1206]  85.34,62.87 270 top
R145  100 1%  [R1206]  86.61,71.75 90 top
R146  3.3K  [R1206]  87.88,94.61 270 top
R147  33 1W  [R2512]  80.9,36.83 90 top
R148  62  [R1206]  88.52,62.87 270 top
R149  100 1%  [R1206]  89.79,71.75 90 top
R150  3.3K  [R1206]  91.06,94.61 270 top
R151  33 1W  [R2512]  85.34,36.83 90 top
R152  62  [R1206]  91.69,62.87 270 top
R153  100  [R1206]  47.88,45.72 0 top
R154  100 1%  [R1206]  92.33,71.75 90 top
R155  1M  [R1206]  93.22,127 180 top
R156  62  [R1206]  13.97,136.53 0 top
R157  62  [R1206]  13.97,133.99 0 top
R158  62  [R1206]  13.97,131.44 0 top
R159  62  [R1206]  13.97,128.91 0 top
R163  1M  [R1206]  77.47,134.24 90 top
R164  1M  [R1206]  82.55,134.24 90 top
R165  1M  [R1206]  133.99,136.14 90 top
R166  1M  [R1206]  141.6,136.14 90 top
R167  1M  [R1206]  198.12,136.14 90 top
R168  1M  [R1206]  201.93,136.14 90 top
R169  1K  [R1206]  50.16,15.88 180 top
R170  120  [R1206]  207.65,112.39 90 top
T1  PMV56XN  [SOT23]  28.57,26.67 270 top
U$1  SP720APP  [SO16]  24.77,55.24 270 top
U$2  PIC24HJ128GP-202  [SO28W]  27.3,128.91 270 top
U$3  ASE  [ASE]  27.3,113.67 90 top
U$4  MAX3440E  [SO-08]  10.16,122.56 270 top
U$6  MCP-3008  [SO16]  24.77,66.67 270 top
U$7  MAX6105  [SOT23]  33.02,89.53 270 top

## Library data of the parts
12V AIN0 AIN1-AIN7 CELLS-11-20 CELLS-21-30 CONTACTOR GND-10 PROGRAM = con-molex; OC_FARNELL: unknown; OC_NEWARK: unknown
C1-C54 L1-L45 R1-R159 R169 R170 = rcl
D1-D45 = diode
IC1 IC2_\ IC3_ = adum140x
IC2 = linear
IC3 = burr-brown; MPN: REG1117; OC_FARNELL: 1097566; OC_NEWARK: 14P6981
J1-J18 = jump-0r-smd
J19 J20 = con-tycoelectronics; MF: TYCO ELECTRONICS; MPN: RJ11-2L-B; OC_FARNELL: unknown; OC_NEWARK: 83F4463
K1 = relay; OC_FARNELL: unknown; OC_NEWARK: unknown
LED1-LED40 = led
LTC1-LTC3 U$2 = LTC6803
Q1-Q36 = transistor-power
R163-R168 = resistor
T1 = SolarJacketsADC; PART_NUM: PMV56XN,215
U$1 U$6 U$7 = SolarJackets_Common
U$3 = crystal; OC_FARNELL: unknown; OC_NEWARK: unknown
U$4 = SolarJackets

## Nets
12V: 12V.4 C50.1 C51.1 C53.1 IC2.1 IC3.3 R169.2 U$7.1
+3V3: C16.1 C48.1 C52.1 IC3.2 PROGRAM.6 R52.1 U$2.13 U$2.28 U$3.1 U$3.4
+5V: AIN0.2 AIN1.2 AIN2.2 AIN3.2 AIN4.2 AIN5.2 AIN6.2 AIN7.2 C54.1 IC1.1 IC1.7 IC2.2 IC2_\.1 IC2_\.7 IC3_.1 IC3_.7 U$1.16 U$4.8 U$6.16
AGND [Mini]: C17.2 C18.2 C19.2 C20.2 C21.2 C23.2 C24.2 C25.2 C26.2 C27.2 C28.2 C29.2 C30.2 C31.2 C32.2 D28.A D29.A D30.A IC2_\.9 IC2_\.15 J6.3 J7.3 J8.3 J9.3 J10.3 J17.3 L29.2 LTC2.P$27 LTC2.P$28 LTC2.P$29 LTC2.P$30 LTC2.P$35 LTC2.P$36
CELL0: GND-10.1 L16.1 L17.1
CELL1: GND-10.2 L14.1
CELL2: GND-10.3 L13.1
CELL3: GND-10.4 L12.1
CELL4: GND-10.5 L11.1
CELL5: GND-10.6 L10.1
CELL6: GND-10.7 L9.1
CELL7: GND-10.8 L8.1
CELL8: GND-10.9 L7.1
CELL9: GND-10.10 L6.1
CELL10: GND-10.11 L1.1 L4.1 L5.1 L15.1 L29.1 L30.1
CELL11: CELLS-11-20.1 L27.1
CELL12: CELLS-11-20.2 L26.1
CELL13: CELLS-11-20.3 L25.1
CELL14: CELLS-11-20.4 L24.1
CELL15: CELLS-11-20.5 L23.1
CELL16: CELLS-11-20.6 L22.1
CELL17: CELLS-11-20.7 L21.1
CELL18: CELLS-11-20.8 L20.1
CELL19: CELLS-11-20.9 L19.1
CELL20: CELLS-11-20.10 L2.1 L3.1 L18.1 L28.1 L44.1 L45.1
CELL21: CELLS-21-30.1 L42.1
CELL22: CELLS-21-30.2 L41.1
CELL23: CELLS-21-30.3 L40.1
CELL24: CELLS-21-30.4 L39.1
CELL25: CELLS-21-30.5 L38.1
CELL26: CELLS-21-30.6 L37.1
CELL27: CELLS-21-30.7 L36.1
CELL28: CELLS-21-30.8 L35.1
CELL29: CELLS-21-30.9 L34.1
CELL30: CELLS-21-30.10 L31.1 L32.1 L33.1 L43.1
GND [Mini]: C1.2 C2.2 C3.2 C4.2 C5.2 C6.2 C7.2 C8.2 C9.2 C10.2 C11.2 C12.2 C13.2 C14.2 C15.2 D16.A D17.A D18.A IC1.9 IC1.15 J1.3 J2.3 J3.3 J4.3 J5.3 J18.3 L16.2 LTC1.P$27 LTC1.P$28 LTC1.P$29 LTC1.P$30 LTC1.P$35 LTC1.P$36
GNDIO: 12V.1 AIN0.1 AIN1.1 AIN2.1 AIN3.1 AIN4.1 AIN5.1 AIN6.1 AIN7.1 C16.2 C22.2 C48.2 C49.2 C50.2 C51.2 C52.2 C53.2 C54.2 IC1.2 IC1.8 IC2.3 IC2_\.2 IC2_\.8 IC3.1 IC3_.2 IC3_.8 LED37.C LED38.C LED39.C LED40.C PROGRAM.5 R52.2 R53.1 T1.2 U$1.8 U$2.8 U$2.19 U$2.27 U$3.2 U$4.5 U$6.9 U$6.14 U$7.3
MCLR: PROGRAM.4 R53.2 U$2.1
N$1 [Mini]: C1.1 D1.C LTC1.P$2 R1.2
N$2: L1.2 Q1.3 R1.1
N$3 [Mini]: LTC1.P$3 R2.2
N$4: K1.2 T1.3
N$5: Q1.1 R2.1
N$6: LED1.A Q1.2 R3.2
N$7: LED1.C R4.2
N$8: L4.2 Q2.3 R3.1 R4.1 R6.1
N$9 [Mini]: C3.1 D1.A D5.C LTC1.P$4 R6.2
N$10: J1.2 R5.2
N$11 [Mini]: LTC1.P$33 R5.1
N$12 [Mini]: J4.2 LTC1.P$38
N$13 [Mini]: J3.2 LTC1.P$39
N$14 [Mini]: J2.2 LTC1.P$40
N$15 [Mini]: J5.2 LTC1.P$37
N$16 [Mini]: LTC1.P$5 R7.2
N$17: Q2.1 R7.1
N$18: LED2.A Q2.2 R8.2
N$19: LED2.C R9.2
N$20: L5.2 Q3.3 R8.1 R9.1 R10.1
N$21 [Mini]: IC1.12 LTC1.P$44
N$22 [Mini]: C4.1 D5.A D6.C LTC1.P$6 R10.2
N$23 [Mini]: IC1.13 LTC1.P$42
N$24 [Mini]: IC1.14 LTC1.P$41
N$25 [Mini]: LTC1.P$7 R11.2
N$26: Q3.1 R11.1
N$27: LED3.A Q3.2 R12.2
N$28: LED3.C R13.2
N$29: L6.2 Q4.3 R12.1 R13.1 R14.1
N$30 [Mini]: C15.1 LTC1.P$31
N$31 [Mini]: C5.1 D6.A D7.C LTC1.P$8 R14.2
N$33 [Mini]: C17.1 D2.C LTC2.P$2 R54.2
N$34 [Mini]: LTC1.P$9 R15.2
N$35: Q4.1 R15.1
N$36: LED4.A Q4.2 R16.2
N$37: LED4.C R17.2
N$38: L7.2 Q5.3 R16.1 R17.1 R18.1
N$39: L2.2 Q13.3 R54.1
N$40 [Mini]: C6.1 D7.A D8.C LTC1.P$10 R18.2
N$41 [Mini]: LTC2.P$3 R55.2
N$42: Q13.1 R55.1
N$43 [Mini]: LTC1.P$11 R19.2
N$44: Q5.1 R19.1
N$45: LED5.A Q5.2 R20.2
N$46: LED5.C R21.2
N$47: L8.2 Q6.3 R20.1 R21.1 R22.1
N$48: C22.1 U$2.20
N$49 [Mini]: C7.1 D8.A D9.C LTC1.P$12 R22.2
N$50: LED13.A Q13.2 R56.2
N$51: LED13.C R57.2
N$52 [Mini]: LTC1.P$13 R23.2
N$53: Q6.1 R23.1
N$54: LED6.A Q6.2 R24.2
N$55: LED6.C R25.2
N$56: L9.2 Q7.3 R24.1 R25.1 R26.1
N$57: L3.2 Q14.3 R56.1 R57.1 R58.1
N$58 [Mini]: C8.1 D9.A D10.C LTC1.P$14 R26.2
N$59 [Mini]: C18.1 D2.A D3.C LTC2.P$4 R58.2
N$60 [Mini]: LTC2.P$5 R59.2
N$61 [Mini]: LTC1.P$15 R27.2
N$62: Q7.1 R27.1
N$63: LED7.A Q7.2 R28.2
N$64: LED7.C R29.2
N$65: L10.2 Q8.3 R28.1 R29.1 R30.1
N$66: Q14.1 R59.1
N$67 [Mini]: C9.1 D10.A D11.C LTC1.P$16 R30.2
N$68: LED14.A Q14.2 R60.2
N$69: LED14.C R61.2
N$70 [Mini]: LTC1.P$17 R31.2
N$71: Q8.1 R31.1
N$72: LED8.A Q8.2 R32.2
N$73: LED8.C R33.2
N$74: L11.2 Q9.3 R32.1 R33.1 R34.1
N$75: L18.2 Q15.3 R60.1 R61.1 R62.1
N$76 [Mini]: C10.1 D11.A D12.C LTC1.P$18 R34.2
N$77 [Mini]: C19.1 D3.A D4.C LTC2.P$6 R62.2
N$78 [Mini]: LTC2.P$7 R63.2
N$79 [Mini]: LTC1.P$19 R35.2
N$80: Q9.1 R35.1
N$81: LED9.A Q9.2 R36.2
N$82: LED9.C R37.2
N$83: L12.2 Q10.3 R36.1 R37.1 R38.1
N$84: Q15.1 R63.1
N$85 [Mini]: C11.1 D12.A D13.C LTC1.P$20 R38.2
N$86: LED15.A Q15.2 R64.2
N$87: LED15.C R65.2
N$88 [Mini]: LTC1.P$21 R39.2
N$89: Q10.1 R39.1
N$90: LED10.A Q10.2 R40.2
N$91: LED10.C R41.2
N$92: L13.2 Q11.3 R40.1 R41.1 R42.1
N$93: L19.2 Q16.3 R64.1 R65.1 R66.1
N$94 [Mini]: C12.1 D13.A D14.C LTC1.P$22 R42.2
N$95 [Mini]: C20.1 D4.A D19.C LTC2.P$8 R66.2
N$96 [Mini]: LTC2.P$9 R67.2
N$97 [Mini]: LTC1.P$23 R43.2
N$98: Q11.1 R43.1
N$99: LED11.A Q11.2 R44.2
N$100: LED11.C R45.2
N$101: L14.2 Q12.3 R44.1 R45.1 R46.1
N$102: Q16.1 R67.1
N$103 [Mini]: C13.1 D14.A D15.C LTC1.P$24 R46.2
N$104: LED16.A Q16.2 R68.2
N$105: LED16.C R69.2
N$106 [Mini]: LTC1.P$25 R47.2
N$107: Q12.1 R47.1
N$108: LED12.A Q12.2 R48.2
N$109: LED12.C R49.2
N$110: L17.2 R48.1 R49.1 R51.1
N$111: L20.2 Q17.3 R68.1 R69.1 R70.1
N$112 [Mini]: D15.A LTC1.P$26 R51.2
N$113 [Mini]: C21.1 D19.A D20.C LTC2.P$10 R70.2
N$114: D16.C D17.C D18.C L15.2 R50.1
N$115 [Mini]: C14.1 LTC1.P$1 R50.2
N$116 [Mini]: LTC2.P$11 R71.2
N$117: Q17.1 R71.1
N$118: LED17.A Q17.2 R72.2
N$119: LED17.C R73.2
N$120: L21.2 Q18.3 R72.1 R73.1 R74.1
N$121 [Mini]: C23.1 D20.A D21.C LTC2.P$12 R74.2
N$122 [Mini]: LTC2.P$13 R75.2
N$123: Q18.1 R75.1
N$124: LED18.A Q18.2 R76.2
N$125: LED18.C R77.2
N$126: L22.2 Q19.3 R76.1 R77.1 R78.1
N$127 [Mini]: C24.1 D21.A D22.C LTC2.P$14 R78.2
N$128 [Mini]: LTC2.P$15 R79.2
N$129: Q19.1 R79.1
N$130: LED19.A Q19.2 R80.2
N$131: LED19.C R81.2
N$132: L23.2 Q20.3 R80.1 R81.1 R82.1
N$133 [Mini]: C25.1 D22.A D23.C LTC2.P$16 R82.2
N$134 [Mini]: LTC2.P$17 R83.2
N$135: Q20.1 R83.1
N$136: LED20.A Q20.2 R84.2
N$137: LED20.C R85.2
N$138: L24.2 Q21.3 R84.1 R85.1 R86.1
N$139 [Mini]: C26.1 D23.A D24.C LTC2.P$18 R86.2
N$140 [Mini]: LTC2.P$19 R87.2
N$141: Q21.1 R87.1
N$142: LED21.A Q21.2 R88.2
N$143: LED21.C R89.2
N$144: L25.2 Q22.3 R88.1 R89.1 R90.1
N$145 [Mini]: C27.1 D24.A D25.C LTC2.P$20 R90.2
N$146 [Mini]: LTC2.P$21 R91.2
N$147: Q22.1 R91.1
N$148: LED22.A Q22.2 R92.2
N$149: LED22.C R93.2
N$150: L26.2 Q23.3 R92.1 R93.1 R94.1
N$151 [Mini]: C28.1 D25.A D26.C LTC2.P$22 R94.2
N$152 [Mini]: LTC2.P$23 R95.2
N$153: Q23.1 R95.1
N$154: LED23.A Q23.2 R96.2
N$155: LED23.C R97.2
N$156: L27.2 Q24.3 R96.1 R97.1 R98.1
N$157 [Mini]: C29.1 D26.A D27.C LTC2.P$24 R98.2
N$158 [Mini]: LTC2.P$25 R99.2
N$159: Q24.1 R99.1
N$160: LED24.A Q24.2 R100.2
N$161: LED24.C R101.2
N$162: L30.2 R100.1 R101.1 R103.1
N$163 [Mini]: D27.A LTC2.P$26 R103.2
N$164: D28.C D29.C D30.C L28.2 R102.1
N$165 [Mini]: C30.1 LTC2.P$1 R102.2
N$166: J6.2 R104.2
N$167 [Mini]: LTC2.P$33 R104.1
N$168 [Mini]: J8.2 LTC2.P$39
N$169 [Mini]: J7.2 LTC2.P$40
N$170 [Mini]: J9.2 LTC2.P$38
N$171 [Mini]: J10.2 LTC2.P$37
N$172: K1.1 R169.1
N$173 [Mini]: IC2_\.12 LTC2.P$44
N$174 [Mini]: IC2_\.13 LTC2.P$42
N$175 [Mini]: IC2_\.14 LTC2.P$41
N$176 [Mini]: C32.1 LTC2.P$31
N$177 [Mini]: C33.1 D31.C LTC3.P$2 R105.2
N$178: L31.2 Q25.3 R105.1
N$179 [Mini]: LTC3.P$3 R106.2
N$180: Q25.1 R106.1
N$181: LED25.A Q25.2 R107.2
N$182: LED25.C R108.2
N$183: L32.2 Q26.3 R107.1 R108.1 R109.1
N$184 [Mini]: C34.1 D31.A D32.C LTC3.P$4 R109.2
N$185 [Mini]: LTC3.P$5 R110.2
N$186: Q26.1 R110.1
N$187: LED26.A Q26.2 R111.2
N$188: LED26.C R112.2
N$189: L33.2 Q27.3 R111.1 R112.1 R113.1
N$190 [Mini]: C35.1 D32.A D33.C LTC3.P$6 R113.2
N$191 [Mini]: LTC3.P$7 R114.2
N$192: Q27.1 R114.1
N$193: LED27.A Q27.2 R115.2
N$194: LED27.C R116.2
N$195: L34.2 Q28.3 R115.1 R116.1 R117.1
N$196 [Mini]: C36.1 D33.A D34.C LTC3.P$8 R117.2
N$197 [Mini]: LTC3.P$9 R118.2
N$198: Q28.1 R118.1
N$199: LED28.A Q28.2 R119.2
N$200: LED28.C R120.2
N$201: L35.2 Q29.3 R119.1 R120.1 R121.1
N$202 [Mini]: C37.1 D34.A D35.C LTC3.P$10 R121.2
N$203 [Mini]: LTC3.P$11 R122.2
N$204: Q29.1 R122.1
N$205: LED29.A Q29.2 R123.2
N$206: LED29.C R124.2
N$207: L36.2 Q30.3 R123.1 R124.1 R125.1
N$208 [Mini]: C38.1 D35.A D36.C LTC3.P$12 R125.2
N$209 [Mini]: LTC3.P$13 R126.2
N$210: Q30.1 R126.1
N$211: LED30.A Q30.2 R127.2
N$212: LED30.C R128.2
N$213: L37.2 Q31.3 R127.1 R128.1 R129.1
N$214 [Mini]: C39.1 D36.A D37.C LTC3.P$14 R129.2
N$215 [Mini]: LTC3.P$15 R130.2
N$216: Q31.1 R130.1
N$217: LED31.A Q31.2 R131.2
N$218: LED31.C R132.2
N$219: L38.2 Q32.3 R131.1 R132.1 R133.1
N$220 [Mini]: C40.1 D37.A D38.C LTC3.P$16 R133.2
N$221 [Mini]: LTC3.P$17 R134.2
N$222: Q32.1 R134.1
N$223: LED32.A Q32.2 R135.2
N$224: LED32.C R136.2
N$225: L39.2 Q33.3 R135.1 R136.1 R137.1
N$226 [Mini]: C41.1 D38.A D39.C LTC3.P$18 R137.2
N$227 [Mini]: LTC3.P$19 R138.2
N$228: Q33.1 R138.1
N$229: LED33.A Q33.2 R139.2
N$230: LED33.C R140.2
N$231: L40.2 Q34.3 R139.1 R140.1 R141.1
N$232 [Mini]: C42.1 D39.A D40.C LTC3.P$20 R141.2
N$233 [Mini]: LTC3.P$21 R142.2
N$234: Q34.1 R142.1
N$235: LED34.A Q34.2 R143.2
N$236: LED34.C R144.2
N$237: L41.2 Q35.3 R143.1 R144.1 R145.1
N$238 [Mini]: C43.1 D40.A D41.C LTC3.P$22 R145.2
N$239 [Mini]: LTC3.P$23 R146.2
N$240: Q35.1 R146.1
N$241: LED35.A Q35.2 R147.2
N$242: LED35.C R148.2
N$243: L42.2 Q36.3 R147.1 R148.1 R149.1
N$244 [Mini]: C44.1 D41.A D42.C LTC3.P$24 R149.2
N$245 [Mini]: LTC3.P$25 R150.2
N$246: Q36.1 R150.1
N$247: LED36.A Q36.2 R151.2
N$248: LED36.C R152.2
N$249: L45.2 R151.1 R152.1 R154.1
N$250 [Mini]: D42.A LTC3.P$26 R154.2
N$251: D43.C D44.C D45.C L43.2 R153.1
N$252 [Mini]: C45.1 LTC3.P$1 R153.2
N$253: J11.2 R155.2
N$254 [Mini]: LTC3.P$33 R155.1
N$255 [Mini]: J13.2 LTC3.P$39
N$256 [Mini]: J12.2 LTC3.P$40
N$257 [Mini]: J14.2 LTC3.P$38
N$258 [Mini]: J15.2 LTC3.P$37
N$260 [Mini]: IC3_.12 LTC3.P$44
N$261 [Mini]: IC3_.13 LTC3.P$42
N$262 [Mini]: IC3_.14 LTC3.P$41
N$263 [Mini]: C47.1 LTC3.P$31
N$264: AIN7.3 U$1.7 U$6.8
N$265: AIN6.3 U$1.6 U$6.7
N$266: AIN5.3 U$1.5 U$6.6
N$267: AIN0.3 U$1.1 U$6.1
N$268: AIN1.3 U$1.2 U$6.2
N$269: AIN2.3 U$6.3
N$270: AIN3.3 U$1.3 U$6.4
N$271: AIN4.3 U$1.4 U$6.5
N$272: LED37.A R157.1
N$273: LED38.A R156.1
N$274: LED39.A R159.1
N$275: LED40.A R158.1
N$278: CONTACTOR.2 K1.P K1.P@
N$280: CONTACTOR.1 K1.S K1.S@
N$283 [Mini]: IC1.11 LTC1.P$43 R167.2 R168.2
N$284 [Mini]: J18.1 R168.1
N$285 [Mini]: J18.2 LTC1.P$34
N$286 [Mini]: IC2_\.11 LTC2.P$43 R165.2 R166.2
N$287 [Mini]: J17.1 R166.1
N$288 [Mini]: J17.2 LTC2.P$34
N$289 [Mini]: J16.2 LTC3.P$34
N$290 [Mini]: IC3_.11 LTC3.P$43 R163.2 R164.2
N$291: J16.1 R164.1
N$295: J19.3 J20.3 R170.1 U$4.7
N$296: J19.4 J20.4 R170.2 U$4.6
OSC1: PROGRAM.1 U$2.9 U$3.3
PE [Mini]: C33.2 C34.2 C35.2 C36.2 C37.2 C38.2 C39.2 C40.2 C41.2 C42.2 C43.2 C44.2 C45.2 C46.2 C47.2 D43.A D44.A D45.A IC3_.9 IC3_.15 J11.3 J12.3 J13.3 J14.3 J15.3 J16.3 L44.2 LTC3.P$27 LTC3.P$28 LTC3.P$29 LTC3.P$30 LTC3.P$35 LTC3.P$36
PGEC1: PROGRAM.2 U$2.5
PGED1: PROGRAM.3 U$2.4
RA0: R156.2 U$2.2
RA1: R157.2 U$2.3
RA3: R158.2 U$2.10
RA4: R159.2 U$2.12
RB2: U$2.6 U$4.2
RB3: U$2.7 U$4.3
RB4: U$2.11 U$4.4
RB5: T1.1 U$2.14
RB6: IC1.3 IC2_\.3 IC3_.3 U$2.15
RB7: IC1.4 IC2_\.4 IC3_.4 U$2.16
RB8: IC1.5 IC2_\.5 IC3_.5 U$2.17
RB9: IC1.6 U$2.18
RB10: IC2_\.6 U$2.21
RB11: IC3_.6 U$2.22
RB12: U$2.23 U$6.13
RB13: U$2.24 U$6.12
RB14: U$2.25 U$6.11
RB15: U$2.26 U$6.10
V+ [Mini]: C2.1 IC1.10 IC1.16 J1.1 J2.1 J3.1 J4.1 J5.1 LTC1.P$32 R167.1
VCC [Mini]: C31.1 IC2_\.10 IC2_\.16 J6.1 J7.1 J8.1 J9.1 J10.1 LTC2.P$32 R165.1
VCC/2 [Mini]: C46.1 IC3_.10 IC3_.16 J11.1 J12.1 J13.1 J14.1 J15.1 LTC3.P$32 R163.1
VCCIO: C49.1 U$6.15 U$7.2

## Tracks (layer width: path | path; a pad name or v marks a point on that pad's centre or on a via)
12V  (via drill 0.46 pad 0.86)
  Top 0.254: 32.89,92.88 31.31,92.88 29.12,95.07 29.12,98.17 v27.7,99.59 27.04,100.25 27.04,102.87 C51.1 | 32.89,92.88 32.89,92.11 32.09,91.31 31.92,91.31 31.92,90.9 | C50.1 32.89,92.88 | 24.34,89.54 23.5,90.38 23.5,93.11 24.16,93.76 IC3.3 | 27.43,88.86 | 27.43,88.86 25.02,88.86 24.34,89.54 | 24.34,89.54 19.96,85.17 IC2.1 | 27.43,88.86 29.48,90.9 31.92,90.9 | 27.43,88.86 27.43,88.73 C53.1 | v48.55,19.36 48.74,19.17 R169.2 | U$7.1 31.92,90.9
  Bottom 0.254: 27.7,101.47 v27.7,99.59 | 27.7,101.47 27.7,101.91 15.94,113.67 12V.4 | 27.7,101.47 41.23,101.47 44.01,98.69 44.01,23.9 v48.55,19.36
+3V3
  Top 0.254: 24.14,121.92 24.64,122.43 24.64,125.69 23.98,126.36 21.44,126.36 21.27,126.52 21.27,128.77 21.42,128.91 24.26,128.91 25.63,130.28 25.63,132.31 30.48,137.16 U$2.28 | 24.14,121.92 25.82,120.23 25.82,112.61 U$3.4 | U$2.13 24.14,121.92 | U$3.4 U$3.1 28.79,112.61 30.47,114.3 30.47,115.57 R52.1 | U$3.4 26.48,111.83 25.88,111.23 | 25.88,111.23 25.88,110.5 25.91,110.47 C48.1 27.04,109.86 27.04,108.91 28.01,107.93 | 25.88,111.23 21.5,111.23 20.95,111.77 C16.1 | 28.01,107.93 38.15,97.79 PROGRAM.6 | 24.16,96.59 22.78,97.96 22.78,102.7 28.01,107.93 | 24.16,96.59 24.16,96.05 25.23,96.05 25.51,95.77 25.51,93.55 24.64,92.67 C52.1 | IC3.2 24.16,96.59
+5V  (via drill 0.46 pad 0.86)
  Top 0.254: IC3_.7 43.31,134.3 43.27,134.3 v42.62,134.96 | v14.81,124.71 14.45,124.71 14.19,124.46 U$4.8 | 110.49,132.35 110.49,132.27 109.66,131.44 108.71,131.44 108.58,131.57 108.58,134.43 107.25,135.75 104.32,135.75 102.87,134.3 IC2_\.7 102.87,131.44 98.5,131.44 92.64,137.3 54.28,137.3 v51.76,134.77 51.28,134.3 50.93,134.3 IC3_.1 | v114.3,133.44 113.21,132.35 110.49,132.35 | 25.93,71.12 25.28,70.47 v25.28,60.96 25.93,60.31 25.93,59.69 U$1.16 | 25.93,71.12 25.13,71.92 25.13,75.56 C54.1 22.87,75.56 22.87,75.9 19.96,78.81 IC2.2 | U$6.16 25.93,71.12 | AIN0.2 14.61,94.1 15.68,94.1 16.61,93.18 16.61,84.55 AIN1.2 | AIN7.2 14.61,7.5 13.53,7.5 12.6,8.43 12.6,17.05 AIN6.2 | 159.34,133.01 159.34,131.39 159.85,130.88 168.35,130.88 168.91,131.44 IC1.1 | 159.34,133.01 159.34,134.06 159.58,134.3 161.29,134.3 IC1.7 | 159.34,133.01 v157.19,133.01 | IC2_\.1 110.49,132.35
  Bottom 0.254: v51.76,134.77 51.13,134.15 43.42,134.15 v42.62,134.96 40.28,137.29 19.31,137.29 14.81,132.8 v14.81,124.71 12,121.9 12,97.93 13.53,96.4 14.61,96.4 AIN0.2 | 12.64,31.75 12.64,42.48 AIN4.2 14.61,45.6 13.53,45.6 12.59,46.53 12.59,55.06 13.53,56 14.61,56 AIN3.2 16.57,57.15 16.57,57.25 19.38,60.06 | 19.38,60.06 12.64,66.8 12.64,67.88 AIN2.2 14.61,71 13.53,71 12.64,71.89 12.64,80.51 13.53,81.4 14.61,81.4 AIN1.2 | v25.28,60.96 24.38,60.06 19.38,60.06 | 12.64,31.75 12.64,21.09 13.53,20.2 14.61,20.2 AIN6.2 | AIN5.2 12.64,31.75 | v157.19,133.01 114.73,133.01 v114.3,133.44
AGND  (via drill 0.46 pad 0.86)
  Top 0.203: LTC2.P$30 LTC2.P$29 130.2,112.12 | 127.2,111.66 129.96,111.66 130.2,111.91 130.2,112.12 | 127.2,111.66 126.75,111.2 112.66,111.2 101.6,122.27 101.6,122.97 IC2_\.9 | 130.2,112.12 130.7,112.12 | 120.09,76.87 120.99,77.77 121.54,77.77 C23.2 | 120.09,71.86 120.09,76.87 | 120.09,76.87 119.19,77.77 118.36,77.77 C21.2 | 126.44,71.86 126.44,76.87 | 132.97,71.67 132.74,71.44 126.86,71.44 126.44,71.86 | 126.44,71.86 126.02,71.44 120.51,71.44 120.09,71.86 | 113.63,71.67 113.86,71.44 119.67,71.44 120.09,71.86 | 113.63,71.67 113.63,78.87 | C19.2 110.32,77.39 110.32,72.05 110.93,71.44 113.4,71.44 113.63,71.67 | 132.97,71.67 132.97,77.05 | 139.29,71.53 139.2,71.44 133.21,71.44 132.97,71.67 | 126.44,76.87 127.34,77.77 127.89,77.77 C25.2 | 126.44,76.87 125.55,77.77 124.71,77.77 C24.2 | 139.29,71.53 139.38,71.44 144.16,71.44 144.97,70.62 144.97,58.18 142.49,55.71 142.49,38.5 142.95,38.05 142.95,37.4 142.49,36.95 142.49,28.54 139.95,26 L29.2 | 139.29,78.32 139.29,71.53 | 139.29,78.32 139.17,78.32 138.62,78.87 | 139.29,78.32 140.59,78.32 C29.2 | 132.97,77.05 133.69,77.77 134.24,77.77 C27.2 | 132.97,77.05 132.26,77.77 131.06,77.77 C26.2 | 131.2,111.66 131.2,109.15 137.42,102.94 137.42,89.83 138.01,89.24 138.01,86.88 138.62,86.28 138.62,78.87 | 130.7,112.12 130.7,111.84 130.88,111.66 131.2,111.66 | LTC2.P$27 131.2,111.66 | LTC2.P$28 130.7,112.12 | 117.82,125.1 118.41,125.69 118.41,126.75 C32.2 | v118.49,124.3 117.82,124.97 117.82,125.1 | 117.82,125.1 109.36,125.1 109.22,124.96 IC2_\.15 | v125.51,125.35 126.15,126 126.36,126 J7.3 | v100.24,78.41 100.7,78.41 100.9,78.61 C31.2 102.11,77.5 97.43,72.83 97.43,47.62
  Top 0.203: 106.15,78.87 106.19,78.9 v106.19,81.91 | 106.15,78.87 106.87,78.87 | C17.2 106.15,78.87 | J9.3 132.93,126.95 J8.3 130.18,125.49 v130.4,125.26 | 127.2,112.17 127.2,111.66 | LTC2.P$35 127.2,112.17 | 126.7,112.68 126.94,112.44 | 126.94,112.44 | 126.94,112.44 127.2,112.17 | 126.7,112.68 126.7,113.52 126.7,114.86 v134.57,122.72 134.57,122.77 137.79,126 J10.3 | LTC2.P$36 126.7,112.68 | 113.63,78.87 C18.2 | C20.2 113.63,78.87 | C19.2 | C28.2 138.62,78.87 | v140.94,125.33 141.6,126 J17.3 142.66,126.95 144.36,126.95 J6.3 | 97.43,47.62 97.43,46.51 98.36,45.58 98.36,44.06 98.54,43.88 100.44,43.88 100.57,44.01 100.57,48.65 100.26,48.96 99.74,48.96 D28.A 99.74,51.5 99.94,51.7 D29.A D30.A | C30.2 97.43,47.62 | C19.2 106.87,78.87 | 106.87,78.87
  Bottom 0.203: v140.94,125.33 137.18,125.33 v134.57,122.72 132.94,122.72 v130.4,125.26 125.55,125.26 125.51,125.31 | 125.51,125.31 119.5,125.31 v118.49,124.3 | 125.51,125.31 v125.51,125.35 | v106.19,81.91 103.74,81.91 v100.24,78.41
CELL0
  Top 0.254: L17.1 L16.1 185.83,22.09 186,21.93 196.58,21.93 197.74,23.09 197.74,64.31 214.07,80.64 216.49,80.64 217.74,81.9 217.74,89.03 217.23,89.53 GND-10.1
CELL1
  Top 0.254: GND-10.2 213.3,87 197.23,70.93 197.23,23.3 196.37,22.44 189.01,22.44 188.23,23.23 178.05,23.23 L14.1
CELL2
  Top 0.254: GND-10.3 217.23,84.45 217.23,87.49 216.54,88.19 213.72,88.19 196.56,71.02 196.56,23.34 196.16,22.95 189.26,22.95 188.48,23.73 175.39,23.73 174.88,23.23 L13.1
CELL3  (via drill 0.46 pad 0.86)
  Top 0.254: L12.1 171.7,23.23 172.41,23.23 173.45,24.26 173.45,26.38 v174.87,27.8
  Bottom 0.254: GND-10.4 213.3,81.92 196.95,65.57 196.95,23.73 196.2,22.99 179.69,22.99 v174.87,27.8
CELL4
  Top 0.254: GND-10.5 198.24,62.35 198.24,22.88 196.33,20.96 168.53,20.96 L11.1
CELL5
  Top 0.254: L10.1 166.78,22.09 166.78,21.45 167.78,20.45 196.54,20.45 198.75,22.66 198.75,60.32 GND-10.6
CELL6
  Top 0.254: L9.1 162.18,20.96 163.2,19.94 196.75,19.94 199.26,22.45 199.26,58.57 214.99,74.3 GND-10.7
CELL7
  Top 0.254: GND-10.8 213.3,71.75 199.77,58.23 199.77,22.24 196.96,19.43 160.53,19.43 159,20.96 L8.1
CELL8
  Top 0.254: GND-10.9 213.3,69.22 200.28,56.2 200.28,22.03 197.17,18.93 157.87,18.93 155.83,20.96 L7.1
CELL9
  Top 0.254: GND-10.10 213.3,66.67 201.29,54.67 201.29,22.33 197.38,18.42 157.13,18.42 154.08,21.47 154.08,22.09 L6.1
CELL10
  Top 0.254: GND-10.11 213.3,64.14 201.8,52.64 201.8,22.12 197.59,17.91 154.39,17.91 150.91,21.39 150.91,22.09 L5.1 L4.1 L1.1 L29.1 L15.1 L30.1
CELL11
  Top 0.254: L27.1 130.43,20.96 133.99,17.4 197.8,17.4 202.31,21.91 202.31,46.16 213.3,57.15 CELLS-11-20.1
CELL12
  Top 0.254: CELLS-11-20.2 213.3,54.61 202.82,44.13 202.82,21.7 198.01,16.89 133.25,16.89 128.68,21.46 128.68,22.09 L26.1
CELL13
  Top 0.254: CELLS-11-20.3 213.3,52.07 203.33,42.1 203.33,21.49 198.22,16.39 128.66,16.39 124.08,20.96 L25.1
CELL14
  Top 0.254: CELLS-11-20.4 213.3,49.53 203.83,40.07 203.83,21.28 198.43,15.88 125.99,15.88 120.9,20.96 L24.1
CELL15
  Top 0.254: L23.1 117.73,20.96 123.32,15.37 198.64,15.37 204.36,21.08 204.36,38.05 213.3,46.99 CELLS-11-20.5
CELL16
  Top 0.254: CELLS-11-20.6 213.3,44.45 204.87,36.02 204.87,20.87 198.85,14.86 120.66,14.86 114.55,20.96 L22.1
CELL17
  Top 0.254: CELLS-11-20.7 213.3,41.91 205.37,33.99 205.37,20.66 199.06,14.35 117.99,14.35 111.38,20.96 L21.1
CELL18
  Top 0.254: L20.1 108.2,20.96 115.32,13.85 199.28,13.85 205.88,20.45 205.88,31.96 213.3,39.37 CELLS-11-20.8
CELL19
  Top 0.254: CELLS-11-20.9 213.3,36.83 206.39,29.92 206.39,20.24 199.49,13.34 114.57,13.34 106.46,21.45 106.46,22.09 L19.1
CELL20
  Top 0.254: CELLS-11-20.10 213.3,34.29 206.9,27.89 206.9,20.03 199.68,12.81 111.89,12.81 103.28,21.42 103.28,22.09 L3.1 L18.1 L28.1 L2.1 L44.1 L45.1
CELL21
  Top 0.254: CELLS-21-30.1 213.3,27.94 207.41,22.05 207.41,19.82 199.89,12.3 91.47,12.3 82.8,20.96 L42.1
CELL22
  Top 0.254: CELLS-21-30.2 213.3,25.4 213.3,24.94 200.15,11.79 88.8,11.79 79.63,20.96 L41.1
CELL23
  Top 0.254: CELLS-21-30.3 213.3,22.86 201.72,11.29 86.13,11.29 76.45,20.96 L40.1
CELL24
  Top 0.254: CELLS-21-30.4 213.3,20.32 203.75,10.78 83.47,10.78 73.28,20.96 L39.1
CELL25
  Top 0.254: CELLS-21-30.5 213.3,17.78 205.79,10.27 80.8,10.27 70.1,20.96 L38.1
CELL26
  Top 0.254: CELLS-21-30.6 213.3,15.24 207.82,9.76 78.13,9.76 66.93,20.96 L37.1
CELL27
  Top 0.254: CELLS-21-30.7 213.3,12.7 209.85,9.25 75.47,9.25 63.75,20.96 L36.1
CELL28
  Top 0.254: CELLS-21-30.8 213.3,10.16 211.88,8.75 72.8,8.75 60.58,20.96 L35.1
CELL29
  Top 0.254: L34.1 57.4,20.96 70.75,7.62 CELLS-21-30.9
CELL30
  Top 0.254: CELLS-21-30.10 70.11,5.08 54.23,20.96 L33.1 L32.1 L43.1 L31.1
GND  (via drill 0.46 pad 0.86)
  Top 0.203: 187.42,70.56 187.42,75.69 | 193.28,70.17 187.82,70.17 187.42,70.56 | 187.42,70.56 187.03,70.17 180.82,70.17 180.59,70.4 | 180.59,70.4 180.59,75.78 | 174.91,70.38 175.12,70.17 180.35,70.17 180.59,70.4 | 180.59,75.78 181.3,76.5 182.5,76.5 C11.2 | 180.59,75.78 179.88,76.5 179.32,76.5 C10.2 | 175.44,76.34 174.91,75.81 174.91,70.38 | 174.91,70.38 174.7,70.17 168.07,70.17 167.87,70.37 | 177.41,112.89 | 177.41,112.89 178.33,113.8 180.19,113.8 193.28,100.72 193.28,70.17 | 193.28,70.17 195.2,68.24 195.2,32.94 187.16,24.89 L16.2 | 187.42,75.69 188.23,76.5 188.85,76.5 C13.2 | 187.42,75.69 187.03,75.69 185.67,77.05 C12.2 | D17.A 148.86,51.72 | 148.84,50.16 148.84,51.7 148.86,51.72 | 148.86,51.72 | 148.84,50.16 149.47,49.53 149.47,44 149.29,43.82 147.47,43.82 146.64,44.64 146.64,47.62 C14.2 | 148.84,50.16 D16.A | D17.A 148.82,53.76 | 158.32,75.83 158.32,70.36 | 158.32,75.83 157.1,77.05 C3.2 | 158.32,75.83 158.99,76.5 160.27,76.5 C4.2 | 158.32,70.36 158.13,70.17 152.25,70.17 | 164.71,70.17 158.52,70.17 158.32,70.36 | 167.87,70.37 167.66,70.17 164.71,70.17 | 175.44,76.34 175.6,76.5 176.15,76.5 C9.2 | 175.44,76.34 174.18,77.6 C8.2 | 167.87,77.32 167.87,70.37 | 167.87,77.32 168.32,77.32 168.59,77.6 C7.2 | 167.87,77.32 166.62,77.32 C6.2 | 164.71,70.17 164.71,75.78 164,76.5 163.45,76.5 C5.2 | 152.25,70.17 149.3,67.22 149.3,66.57 148.84,66.11 148.84,56.32 148.82,56.3 | 148.82,56.3 | 152.25,77.05 152.25,70.17 | D18.A 148.84,55.32 | 148.84,55.32 148.82,56.3 | 161.93,125.08 160.02,125.08 IC1.9 | 161.93,125.08 161.93,125.2 162.31,125.58 167.13,125.58 167.64,125.08 IC1.15 | 173.56,111.03 168.81,111.03 161.93,117.91 161.93,125.08
  Top 0.203: 173.56,111.03 173.56,111.14 LTC1.P$35 173.56,112.04 173.56,112.89 | 173.56,111.03 176.06,111.03 LTC1.P$30 LTC1.P$29 LTC1.P$28 177.06,112.89 177.41,112.89 | 152.25,77.05 151.95,77.34 C2.2 | 152.25,77.05 153.92,77.05 C1.2 | D18.A 148.86,54.26 | v188.21,120.11 190.5,122.41 J3.3 J4.3 | v183.61,120.08 183.01,120.69 C15.2 183.25,127.25 183.56,127.25 184.12,127.25 184.32,127.46 J2.3 | 177.41,112.89 177.5,112.8 177.56,112.8 LTC1.P$27 | 173.56,112.89 173.56,113.62 176.07,116.13 187.35,116.13 v191.08,119.86 191.47,119.86 198.12,126.5 J5.3 | 173.56,112.89 173.06,112.89 LTC1.P$36 | v193,119.44 200.88,127.31 200.88,127.46 J18.3 J1.3 | 148.86,54.26 | 148.86,54.26 148.84,54.24 148.84,53.78 148.82,53.76 | 148.82,53.76 | D17.A 148.9,52.73 D17.A | 148.84,55.32 148.82,55.32 D18.A
  Bottom 0.203: v183.61,120.08 183.64,120.11 v188.21,120.11 190.82,120.11 v191.08,119.86 191.49,119.44 v193,119.44
GNDIO  (via drill 0.46)
  Top 0.254: 29.08,128.27 29.08,134.49 30.48,135.89 U$2.27 32,135.87 33.76,135.87 36.73,132.89 39.47,132.89 | 30.48,125.73 29.08,127.13 29.08,128.27 | 29.08,128.27 24.14,128.27 U$2.8 | 18.69,115.7 19.73,115.7 C16.2 C22.2 | 18.69,115.7 15.94,112.95 15.94,106.05 12V.1 12,106.05 12,95.31 AIN0.1 | 18.69,115.7 14.19,120.2 14.19,120.65 U$4.5 11.33,120.65 10.7,120.02 6.28,120.02 5.61,120.7 5.61,127.56 5.87,127.83 LED39.C LED40.C LED37.C LED38.C | AIN3.1 14.61,55.76 13.53,55.76 12.63,56.66 12.63,64.19 14.61,66.16 AIN2.1 | U$1.8 22.16,47.5 16.57,41.91 AIN4.1 14.61,40.76 12.6,38.75 12.6,31.29 13.53,30.36 14.61,30.36 AIN5.1 14.61,28.06 16.95,25.72 | 29.96,118.11 29.96,125.22 30.48,125.73 | 29.96,118.11 28.13,116.28 U$3.2 | 29.96,118.11 30.47,118.11 R53.1 32.73,118.11 32.73,117.61 34.15,116.19 34.44,116.19 | 34.71,104.98 38.95,109.22 41.13,109.22 41.86,109.95 41.86,111.01 36.68,116.19 34.44,116.19 | C52.2 27.43,96.14 25.23,98.34 24.16,98.34 IC3.1 24.16,103.33 24.93,104.11 26.9,104.11 27.57,103.44 27.57,102.87 C51.2 29.84,102.87 36.39,96.32 | 36.39,96.32 36.39,95.27 35.69,94.58 C50.2 35.69,91.94 34.12,90.36 34.12,89.72 34.12,89.66 | 36.39,96.32 40.89,96.32 41.86,97.29 41.86,100.33 PROGRAM.5 38.15,100.33 38.15,101.54 34.71,104.98 | IC1.8 160.02,131.44 167.64,131.44 167.64,132.16 IC1.2 167.56,132.97 167.56,134.26 v165.2,136.63 | 27.44,85.39 25.77,87.06 25.77,87.63 C53.2 | 27.44,85.39 27.44,83.6 27.27,83.43 IC2.3 27.27,77.26 26.8,76.8 26.8,76.18 C54.2 27.93,75.56 28.8,74.7 28.8,70.65 28.64,70.49 26.14,70.49 25.93,70.29 25.93,68.58 | 34.12,89.66 31.28,89.66 28.88,87.25 28.88,86.83 27.44,85.39
  Top 0.254: T1.2 16.95,25.72 | 16.95,25.72 16.95,18.92 15.68,17.66 14.61,17.66 AIN6.1 | 34.71,104.98 29.84,109.86 C48.2 | R52.2 34.44,116.19 | U$2.19 30.48,125.73 | 25.93,68.58 25.93,62.23 U$6.9 | U$6.14 25.93,68.58 | 34.12,89.66 U$7.3 34.12,88.7 35.05,87.77 C49.2 | 39.47,132.89 41.99,132.89 IC3_.8 | 39.47,132.89 39.47,132.97 42.37,135.87 47.62,135.87 49.61,133.88 49.61,132.89 IC3_.2 49.68,133.96 53.57,137.85 97.61,137.85 101.58,133.88 IC2_\.8 101.65,132.89 101.65,133.81 104.17,136.32 107.44,136.32 109.19,134.57 | 109.19,134.57 109.19,132.89 IC2_\.2 | v111.25,136.63 109.27,134.65 109.19,134.57